# Altium PCB SCH_DATN.pcbdoc
Units mil, origin at the board's own origin, x right, y up, seen from the top; angles counter-clockwise.
Board outline 8805.78 x 10932 mil, 2 copper layers (Top Layer, Bottom Layer); 28 components, 45 nets, 116 pads, 24 vias.
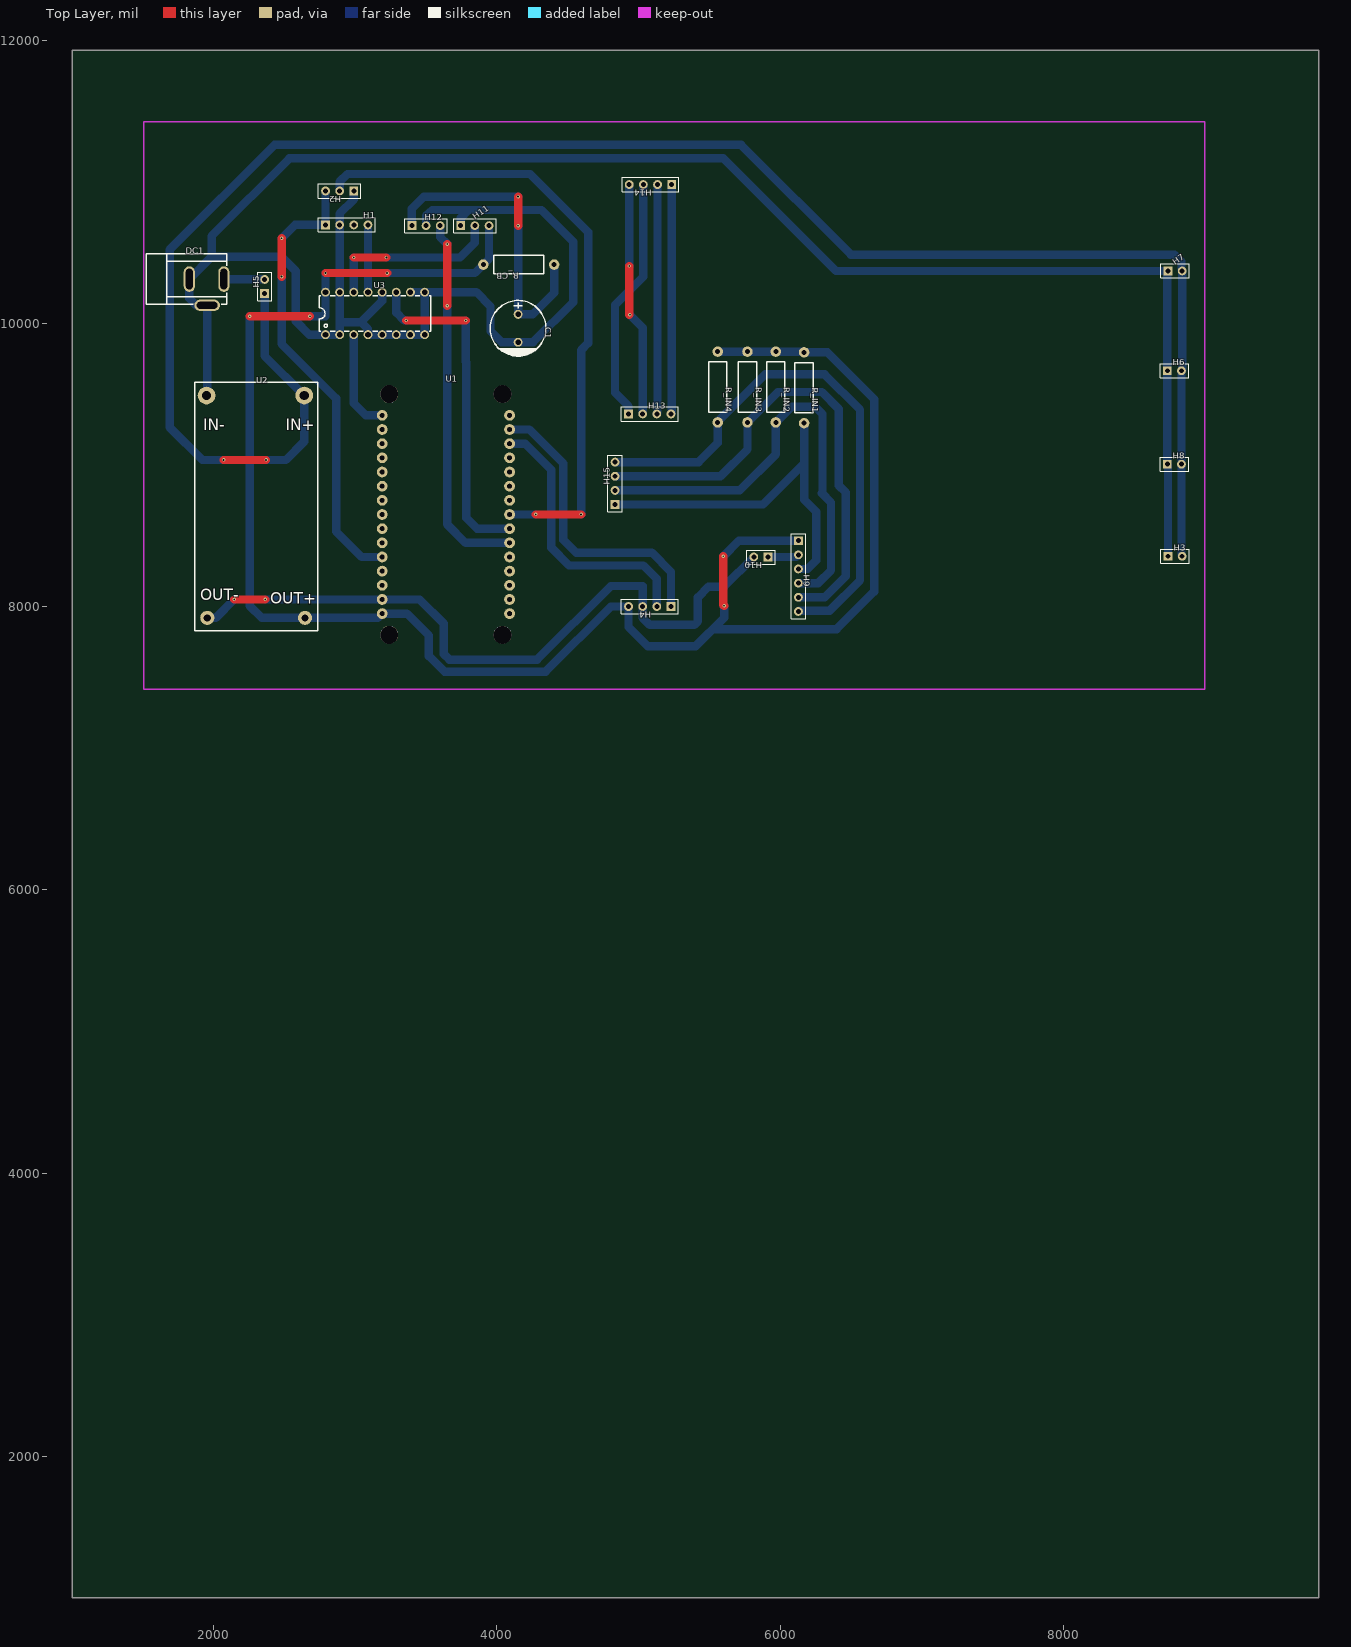
[diagram p0: Top Layer view]
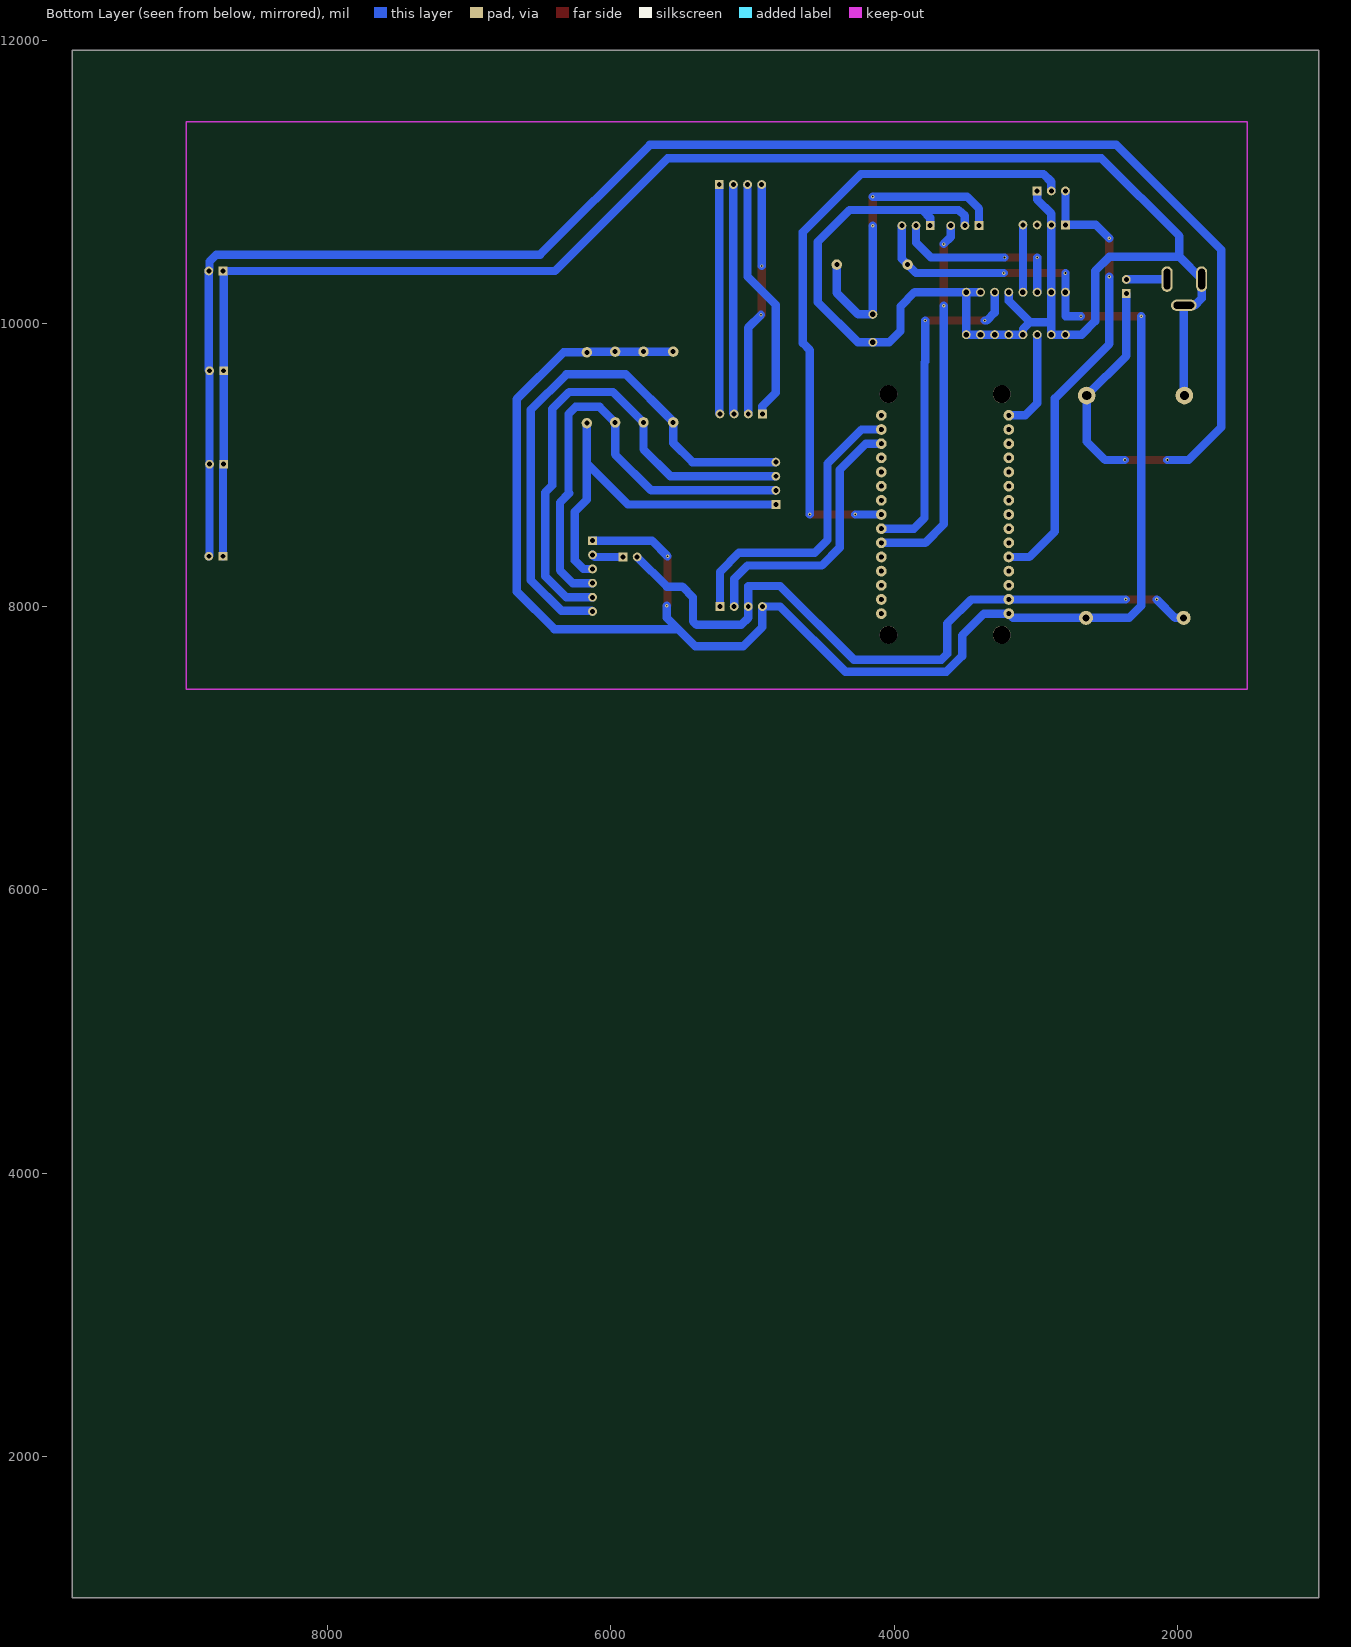
[diagram p1: Bottom Layer view, seen from below]

## Layer stack, top to bottom
Top Solder: solder mask 0.4, Solder Resist, Dk 3.5
Top Layer: signal copper 1.4
Dielectric1: dielectric 12.6, FR-4, Dk 4.8
Bottom Layer: signal copper 1.4
Bottom Solder: solder mask 0.4, Solder Resist, Dk 3.5

## Board outline
9805.78,1000 1000,1000 1000,11932 9805.78,11932

## Design rules (kind name [scope] priority, off if disabled: settings)
Clearance [All] p1: gap=10 ignorepadtopadclearanceinfootprint=FALSE except(0: Arc-Hole Track-Hole SMDPad-Hole THPad-Hole Via-Hole Fill-Hole Poly-Hole Region-Hole Text-Hole)
PolygonConnect [All] p1: connectstyle=Relief reliefconductorwidth=10 reliefentries=4 polygonreliefangle="90 Angle" airgapwidth=10
RoutingVias [All] p1: holewidth=28 width=50 viastyle="Through Hole" minholewidth=28 minwidth=50 maxholewidth=28 maxwidth=50
SolderMaskExpansion [All] p1: expansion=4 istentingtop=FALSE
Width [All] p1: maxlimit=10 minlimit=10 preferedwidth=10
30 further rules are at their usual default settings.

## Components (designator, comment, footprint, x,y, rotation, side; value= is the part's Value field where it differs from the comment)
C1 "220uF" CAP-TH_BD10.0-P5.00-D0.6-FD 4150,9967 r270 top
DC1 "Adapter 12V" DC-IN-TH_DC005 1950,10222 r0 top
H1 "MQ-135" HDR-F-2.54_1X4 2940,10697 r0 top
H2 "DHT11" HDR-F-2.54_1X3 2890,10937 r180 top
H3 "12V_1" HDR-F-2.54_1X2 8790,8357 r0 top
H4 "I2C" HDR-F-2.54_1X4 5080,8002 r180 top
H5 "Cong Tac" HDR-F-2.54_1X2 2360,10262 r90 top
H6 "12V_2" HDR-F-2.54_1X2 8785,9667 r0 top
H7 "12V_3" HDR-F-2.54_1X2 8790,10372 r0 top
H8 "12V_4" HDR-F-2.54_1X2 8785,9007 r0 top
H9 "MODULE RELAY 5V" HDR-F-2.54_1X6 6130,8267 r270 top
H10 "HDR-F-2.54_1x2" HDR-F-2.54_1X2 5865,8352 r180 top
H11 "HDR-F-2.54_1x3" HDR-F-2.54_1X3 3845,10692 r0 top
H12 "HDR-F-2.54_1x3" HDR-F-2.54_1X3 3500,10692 r0 top
H13 "I2C" HDR-F-2.54_1X4 5080,9362 r0 top
H14 "I2C" HDR-F-2.54_1X4 5085,10982 r180 top
H15 "I2C" HDR-F-2.54_1X4 4835,8872 r90 top
R_CB "1k" R_AXIAL-0.5 4155,10417 r180 top
R_IN1 "1k" R_AXIAL-0.5 6170,9547 r270 top
R_IN2 "1k" R_AXIAL-0.5 5970,9552 r270 top
R_IN3 "1k" R_AXIAL-0.5 5770,9552 r270 top
R_IN4 "1k" R_AXIAL-0.5 5560,9552 r270 top
U1 "NODEMCU ESP8266" ESP12E_DEVKIT-V1 3190,9352 r0 top
U2 "LM2596" LM2596DC_DC 1950,9492 r0 top
U3 "CD4051BE_C507164" DIP-16_L20.0-W6.4-P2.54-LS7.6-BL 3140,10072 r0 top
? "" ? 5318.98,8682.06 r0 top
? "" ? 9038.86,9422 r0 top
? "" ? 9189.39,6462 r0 top

## Footprints (in the part's own frame and the unit in brackets; to place one, negate y for a bottom-side part, rotate by r counter-clockwise, add the part's x,y. Pads: shape width x height; smd on the part's side, far side on the other; paste and mask are expansions set on the pad)
CAP-TH_BD10.0-P5.00-D0.6-FD [mm]
  round 1.6 hole 1 paste+0 mask+0.05: 1(-2.5,0) 2(2.5,0)
  silkscreen extent -5,-5 5.08,5
DC-IN-TH_DC005 [mm]
  oval 2x4.6 hole 1.2 slot 3.7 at 90 deg paste+0 mask+0.051: 1(3.1,2.35) 2(-3.1,2.35)
  oval 4.6x2 hole 1.2 slot 3.7 at 0 deg paste+0 mask+0.051: 3(0.1,-2.35)
  silkscreen extent -10.8,-2.15 3.6,6.85
DIP-16_L20.0-W6.4-P2.54-LS7.6-BL [mm]
  round 1.6 hole 1 paste+0 mask+0.051: 1(-8.89,-3.81) 2(-6.35,-3.81) 3(-3.81,-3.81) 4(-1.27,-3.81) 5(1.27,-3.81) 6(3.81,-3.81) 7(6.35,-3.81) 8(8.89,-3.81) 9(8.89,3.81) 10(6.35,3.81) 11(3.81,3.81) 12(1.27,3.81) 13(-1.27,3.81) 14(-3.81,3.81) 15(-6.35,3.81) 16(-8.89,3.81)
  silkscreen extent -10,-3.2 10,3.2
ESP12E_DEVKIT-V1 [mil]
  round 76 hole 31.5 slot 31.7 at 0 deg paste+0 mask+2: 1(900,-1400) 2(900,-1300) 3(900,-1200) 4(900,-1100) 5(900,-1000) 6(900,-900) 7(900,-800) 8(900,-700) 9(900,-600) 10(900,-500) 11(900,-400) 12(900,-300) 13(900,-200) 14(900,-100) 15(900,0) 16(0,0) 17(0,-100) 18(0,-200) 19(0,-300) 20(0,-400) 21(0,-500) 22(0,-600) 23(0,-700) 24(0,-800) 25(0,-900) 26(0,-1000) 27(0,-1100) 28(0,-1200) 29(0,-1300) 30(0,-1400)
  round 125.98 hole 125.98 unplated paste+0: ""(50,-1550) ""(50,150) ""(850,-1550) ""(850,150)
HDR-F-2.54_1X2 [mil]
  rect 62x62 hole 35 paste+0 mask+2: 1(-50,0)
  round 62 hole 35 paste+0 mask+2: 2(50,0)
  silkscreen extent -100,-49 100,50
HDR-F-2.54_1X3 [mil]
  rect 62x62 hole 35 paste+0 mask+2: 1(-100,0)
  round 62 hole 35 paste+0 mask+2: 2(0,0)
  round 62 hole 36 paste+0 mask+2: 3(100,0)
  silkscreen extent -150,-49 150,50
HDR-F-2.54_1X4 [mil]
  rect 62x62 hole 35 paste+0 mask+2: 1(-150,0)
  round 62 hole 35 paste+0 mask+2: 2(-50,0) 3(50,0) 4(150,0)
  silkscreen extent -200,-50 200,50
HDR-F-2.54_1X6 [mil]
  rect 62x62 hole 35 paste+0 mask+2: 1(-200,0)
  round 62 hole 35 paste+0 mask+2: 2(-100,0) 3(0,0) 4(100,0) 5(200,0) 6(300,0)
  silkscreen extent -250,-50 350,50
LM2596DC_DC [mil]
  round 125 hole 65 paste+0 mask+4: 1(690,0) 2(0,0)
  round 100 hole 50 paste+0 mask+4: 3(695,-1570) 4(5,-1570)
  silkscreen extent -85,-1660 785,95
R_AXIAL-0.5 [mil]
  round 74 hole 35.4 paste+0 mask+2: 1(-250,0) 2(250,0)
  silkscreen extent -177,-65 177,65
? [mil]

## Via types
v1: diameter 24.41, hole 12.2, Top Layer to Bottom Layer, 24 vias

## Nets (pads, with @x,y where several pads share a name; then routed paths per layer and width w, separated by ;. In a path a pad name is that pad's centre, name@x,y a point inside that pad or via, vN(x,y) a via of type N, cw(c..) or ccw(c..) an arc to the next point about the centre after c; other vN are vias at no path point)
+3.3V: H1.1 H2.3 U1.26 | length 3218.4
  Top Layer w59.05: v1(2480,10332) v1(2480,10602)
  Bottom Layer w59.05: v1(2480,10332) 2480,9857 2865,9472 2865,8532 3045,8352 U1.26 ; v1(2480,10602) 2575,10697 H1.1 H2.3
+5V: H4.4 H9.1 H11.3 R_CB.2 R_IN1.1 R_IN2.1 R_IN3.1 R_IN4.1 U1.30 U2.3 U3.16 | length 13310.3
  Top Layer w59.05: v1(2255,10052) v1(2680,10052) ; v1(2790,10357) v1(3225,10357) ; v1(5600,8357) 5600,8012 v1(5605,8007)
  Bottom Layer w59.05: v1(2255,10052) 2255,8007 2340,7922 U2.3 3160,7922 U1.30 3365,7952 3520,7797 3520,7652 3630,7542 4345,7542 4805,8002 H4.4 4930,7857 5065,7722 5405,7722 5605,7922 v1(5605,8007) ; v1(2680,10052) 2790,10052 U3.16 v1(2790,10357) ; v1(3225,10357) 3845,10357 R_CB.2 3945,10457 H11.3 ; 5524,7842 6400,7842 6665,8107 6665,9467 6335,9797 R_IN1.1 6165,9802 R_IN2.1 R_IN3.1 R_IN4.1 ; v1(5600,8357) 5710,8467 H9.1
DC1_1: DC1.1 H5.2 | length 289
  Bottom Layer w59.05: DC1.1 2357.49,10314.51 H5.2
DK_LED_CB: H12.3 U1.6 | length 2624.6
  Top Layer w59.05: v1(3650,10127) v1(3650,10562)
  Bottom Layer w59.05: H12.3 3600,10612 v1(3650,10562) ; v1(3650,10127) 3650,8582 3780,8452 U1.6
DK_RELAY1: H9.3 H15.1 R_IN1.2 | length 2610.2
  Bottom Layer w59.05: H15.1 5880,8722 6170,9012 ; H9.3 6195,8267 6255,8327 6255,8672 6170,8757 6170,9012 ; R_IN1.2 6170,9012
DK_RELAY2: H9.4 H15.2 R_IN2.2 | length 3261.1
  Bottom Layer w59.05: H15.2 5715,8822 5970,9077 R_IN2.2 6080,9412 6250,9412 6300,9362 6300,8802 ; H9.4 6270,8167 6360,8257 6360,8737 6295,8802
DK_RELAY3: H9.5 H15.3 R_IN3.2 | length 3585.3
  Bottom Layer w59.05: H15.3 5580,8922 5770,9112 R_IN3.2 5985,9517 6295,9517 6415,9397 6415,8857 6465,8807 6465,8217 6315,8067 H9.5
DK_RELAY4: H9.6 H15.4 R_IN4.2 | length 3909.4
  Bottom Layer w59.05: H15.4 5425,9022 5560,9157 R_IN4.2 5560,9307 5895,9642 6315,9642 6565,9392 6565,8187 6350,7972 6135,7972 H9.6
GND: C1.2 DC1.2 DC1.3 H1.2 H2.1 H3.1 H4.3 H6.1 H7.1 H8.1 H10.2 H11.1 H12.2 U1.29 U2.2 U2.4 U3.1 U3.2 U3.4 U3.5 U3.6 U3.7 U3.8 U3.9 U3.10 U3.12 U3.15 | length 22518.7
  Top Layer w59.05: v1(2145,8052) v1(2365,8052)
  Bottom Layer w59.05: DC1.2 1827.96,10177 1875.48,10129.48 DC1.3 1953.94,9495.94 U2.2 ; DC1.2 1985.4,10472 ; U2.4 2015,7922 v1(2145,8052) ; v1(2365,8052) U1.29 3455,8052 3625,7882 3625,7667 3665,7627 4285,7627 4805,8147 5030,8147 H4.3 5030,7922 5080,7872 5395,7872 5420,7897 5420,8067 5495,8142 5605,8142 H10.2 ; 2890,10010.7 3041.3,10010.7 ; H2.1 2990,10877 2890,10777 H1.2 U3.15 U3.2 U3.1 2675,9922 2580,10017 2580,10372 2480,10472 1985.4,10472 ; U3.12 3190,10159.4 3041.3,10010.7 ; U3.10 U3.9 ; H12.2 3500,10762 3545,10802 3800,10802 ; H11.1 3745,10747 3800,10802 ; H3.1 8740,9002 H8.1 H6.1 8735,10367 H7.1 6395,10372 5600,11167 2535,11167 1985.4,10617.4 1985.4,10472 ; 3041.3,10010.7 3090,9962 U3.4 U3.5 U3.6 U3.7 U3.8 U3.9 ; U3.9 3855,10222 3955,10122 3955,9947 4033.4,9868.6 C1.2 4256.6,9868.6 4540,10152 4540,10577 4315,10802 3800,10802
H1_3: H1.3
H1_4: H1.4 U3.13 | length 475
  Bottom Layer w59.05: U3.13 H1.4
H9_2: H9.2 H10.1 | length 221.2
  Bottom Layer w59.05: H10.1 6115,8352 H9.2
H12_1: C1.1 H12.1 R_CB.1 | length 2254.6
  Top Layer w59.05: v1(4150,10692) v1(4150,10897)
  Bottom Layer w59.05: H12.1 3400,10812 3485,10897 v1(4150,10897) ; v1(4150,10692) C1.1 4253.4,10065.4 4405,10217 R_CB.1
H13_1: H13.1 H14.3 | length 1742.2
  Bottom Layer w59.05: H13.1 4930,9417 4835,9512 4835,10132 5035,10332 H14.3
H13_2: H13.2 H14.4 | length 1657.3
  Top Layer w59.05: v1@4935,10062 v1(4935,10407)
  Bottom Layer w59.05: v1(4935,10407) H14.4 ; v1(4940,10062) 5030,9972 H13.2
H13_3: H13.3 H14.2 | length 1622.1
  Bottom Layer w59.05: H13.3 5135,9367 H14.2
H13_4: H13.4 H14.1 | length 1622.1
  Bottom Layer w59.05: H13.4 5235,9367 H14.1
O-DHT11: H2.2 U1.8 | length 4533.3
  Top Layer w59.05: v1(4275,8652) v1(4595,8652)
  Bottom Layer w59.05: H2.2 2890,11002 2945,11057 4235,11057 4645,10647 4645,9862 4595,9812 v1(4595,8652) ; U1.8 v1(4275,8652)
SELECT: U1.7 U3.11 | length 2390.9
  Top Layer w59.05: v1(3360,10022) v1(3780,10022)
  Bottom Layer w59.05: U3.11 3290,10077 3345,10022 v1(3360,10022) ; v1(3780,10022) 3780,9732 3785,9727 3785,8627 3860,8552 3865,8552 U1.7
U1_1: U1.1
U1_2: U1.2
U1_3: U1.3
U1_4: U1.4
U1_5: U1.5
U1_9: U1.9
U1_10: U1.10
U1_11: U1.11
U1_12: U1.12
U1_13: H4.2 U1.13 | length 1952.8
  Bottom Layer w59.05: U1.13 4200,9152 4385,8967 4385,8417 4510,8292 5035,8292 5130,8197 H4.2
U1_14: H4.1 U1.14 | length 2117.6
  Bottom Layer w59.05: U1.14 4230,9252 4470,9012 4470,8472 4560,8382 5095,8382 5230,8247 H4.1
U1_15: U1.15
U1_16: U1.16 U3.3 | length 720.2
  Bottom Layer w59.05: U3.3 2990,9437 3075,9352 U1.16
U1_17: U1.17
U1_18: U1.18
U1_19: U1.19
U1_20: U1.20
U1_21: U1.21
U1_22: U1.22
U1_23: U1.23
U1_24: U1.24
U1_25: U1.25
U1_27: U1.27
U1_28: U1.28
U2_1: H3.2 H5.1 H6.2 H7.2 H8.2 U2.1 | length 13395.4
  Top Layer w59.05: v1(2070,9037) v1(2370,9037)
  Bottom Layer w59.05: v1(2070,9037) 1920,9037 1690,9267 1690,10522 2430,11262 5725,11262 6500,10487 8786.5,10487 8835,10438.5 8835,10377 H7.2 8840,9672 H6.2 H8.2 8835,8362 H3.2 ; H5.1 2360,9772 U2.1 2640,9167 2510,9037 v1(2370,9037)
U3_14: H11.2 U3.14 | length 1263.5
  Top Layer w59.05: v1(2990,10467) v1(3220,10467)
  Bottom Layer w59.05: U3.14 v1(2990,10467) ; v1(3220,10467) 3740,10467 3845,10572 H11.2
pads on no net: U1.

## Text inside footprints (layer, text, board x,y; h text height)
U1: Document "AD0" at 3240,9352 h32; Document "RSV" at 3240,9252 h32; Document "RSV" at 3240,9152 h32; Document "SD3" at 3240,9052 h32; Document "SD2" at 3240,8952 h32; Document "SD1" at 3240,8852 h32; Document "CMD" at 3240,8752 h32; Document "SD0" at 3240,8652 h32; Document "CLK" at 3240,8552 h32; Document "GND" at 3240,8452 h32; Document "3V3" at 3240,8352 h32; Document "EN" at 3240,8252 h32; Document "RST" at 3240,8152 h32; Document "GND" at 3240,8052 h32; Document "VIN" at 3240,7952 h32; Document "3V3" at 3953.6,7952 h32; Document "GND" at 3953.6,8052 h32; Document "TX" at 3982.4,8152 h32; Document "RX" at 3982.4,8252 h32; Document "D8" at 3953.6,8352 h32; Document "D7" at 3953.6,8452 h32; Document "D6" at 3953.6,8552 h32; Document "D5" at 3953.6,8652 h32; Document "GND" at 3953.6,8752 h32; Document "3V3" at 3953.6,8852 h32; Document "D4" at 3953.6,8952 h32; Document "D3" at 3953.6,9052 h32; Document "D2" at 3953.6,9152 h32; Document "D1" at 3953.6,9252 h32; Document "D0" at 3960,9338.5 h32
U2: Top Overlay "OUT+" at 2400,8022 h80; Top Overlay "OUT-" at 1905,8047 h80; Top Overlay "IN-" at 1925,9247 h80; Top Overlay "IN+" at 2510,9247 h80